# Altium PCB PCB1.PcbDoc (part 2 of 2)
Units mm, origin at the board's own origin, x right, y up, seen from the top; angles counter-clockwise.
Board outline 94.96 x 71.5 mm, 2 copper layers (Top Layer, Bottom Layer), stack 1.58 mm thick; 82 components, 66 nets, 273 pads, 293 vias.
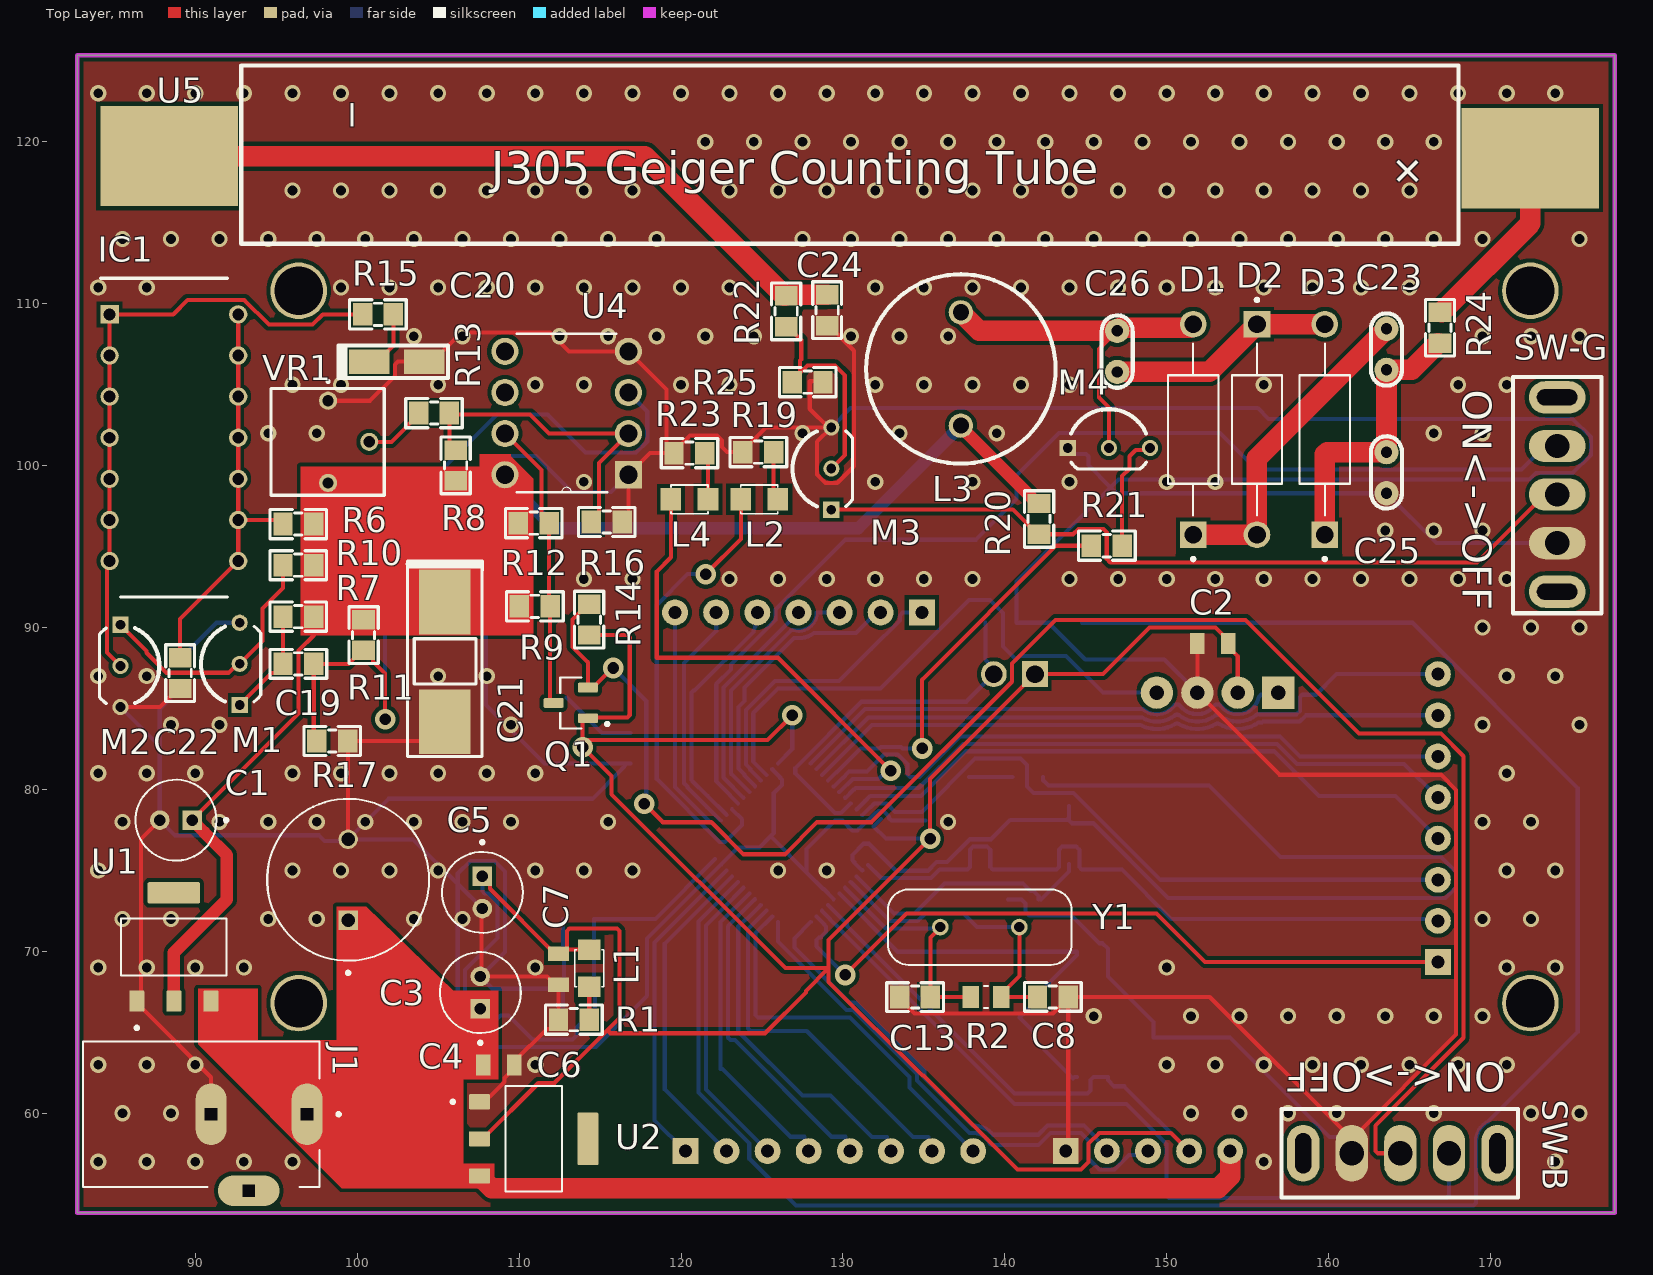
[diagram p0: Top Layer view]

## Silkscreen, mask and mechanical layers (free items; w line width, h text height) (continued)
Bottom Overlay: (continued)
  text "20210345" at 161.417,118.11 h1.52
  text "Radiation Detector v2.0" at 161.417,115.57 h1.52
  text "PA12" at 120.523,88.011 h1.52 r90
  text "PA11" at 123.063,88.011 h1.52 r90
  text "PA10" at 125.602,88.011 h1.52 r90
  text "PA9" at 128.142,88.011 h1.52 r90
  text "PB14" at 130.681,88.011 h1.52 r90
  text "PB13" at 133.221,88.011 h1.52 r90
  text "PB12" at 135.76,88.011 h1.52 r90
  text "PA15" at 161.925,86.741 h1.52 r270
  text "PB5" at 163.449,83.817 h1.52
  text "SWIO" at 149.987,82.423 h1.52 r90
  text "GND" at 152.527,82.423 h1.52 r90
  text "3V3" at 155.066,82.423 h1.52 r90
  text "SWCLK" at 157.606,82.423 h1.52 r90
  text "PB7" at 163.449,81.278 h1.52
  text "PB3" at 163.449,78.738 h1.52
  text "PA1" at 163.449,76.199 h1.52
  text "PC13" at 163.449,73.659 h1.52
  text "PB9" at 163.449,71.12 h1.52
  text "PB8" at 163.449,68.58 h1.52
  text "RX" at 147.828,60.96 h1.52 r270
  text "3V3" at 150.495,60.96 h1.52 r270
  text "9V" at 153.289,60.96 h1.52 r270
  text "PA4" at 119.507,60.833 h1.52 r270
  text "PA5" at 122.047,60.833 h1.52 r270
  text "PA6" at 124.586,60.833 h1.52 r270
  text "PA7" at 127.126,60.833 h1.52 r270
  text "PB0" at 129.665,60.833 h1.52 r270
  text "PB1" at 132.205,60.833 h1.52 r270
  text "PB10" at 134.744,60.833 h1.52 r270
  text "PB11" at 137.284,60.833 h1.52 r270

## Text inside footprints (layer, text, board x,y; h text height)
SW-B: Top Overlay "ON<->OFF" at 170.942,63.119 h1.8 r180
SW-G: Top Overlay "ON<->OFF" at 168.275,104.696 h1.8 r270
U5: Top Overlay "_" at 99.153,120.98 h2.03 r90; Top Overlay "+" at 166.322,117.968 h2.03 r135